# Altium PCB Microprocessor.PcbDoc
Units mil, origin at the board's own origin, x right, y up, seen from the top; angles counter-clockwise.
Board outline 4750 x 3250 mil, 4 copper layers (Top Layer, Layer 1, Layer 2, Bottom Layer), stack 23.756 mil thick; 7 components, 7 nets, 60 pads, 0 vias.
Unrouted connection lines stored in the file: 9.
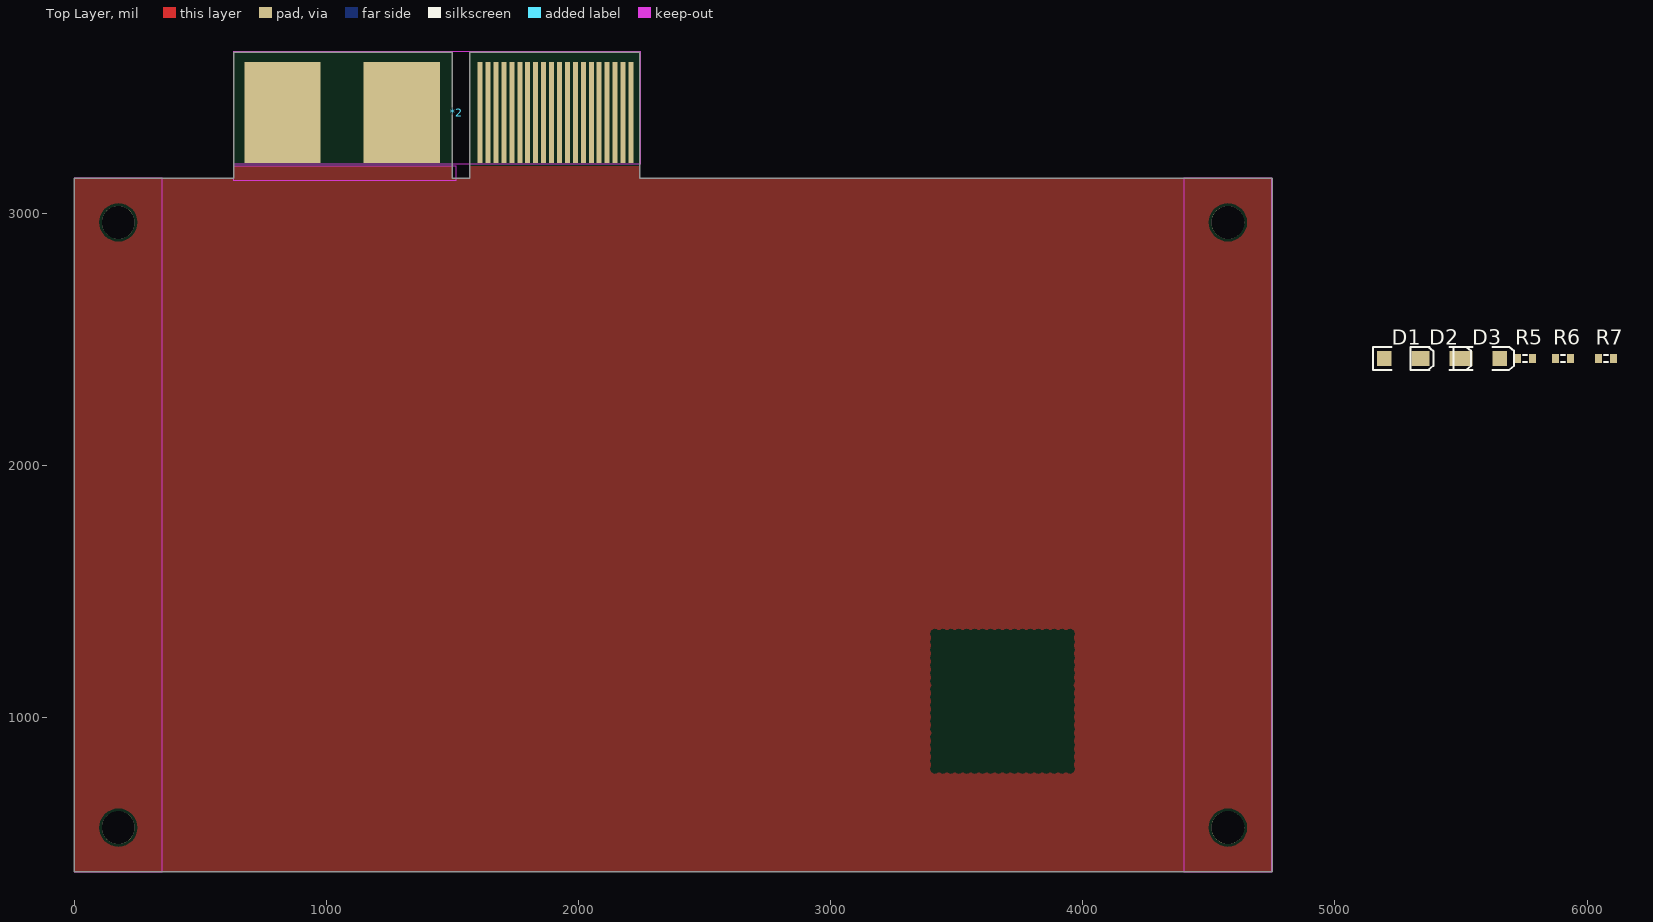
[diagram p0: Top Layer view]
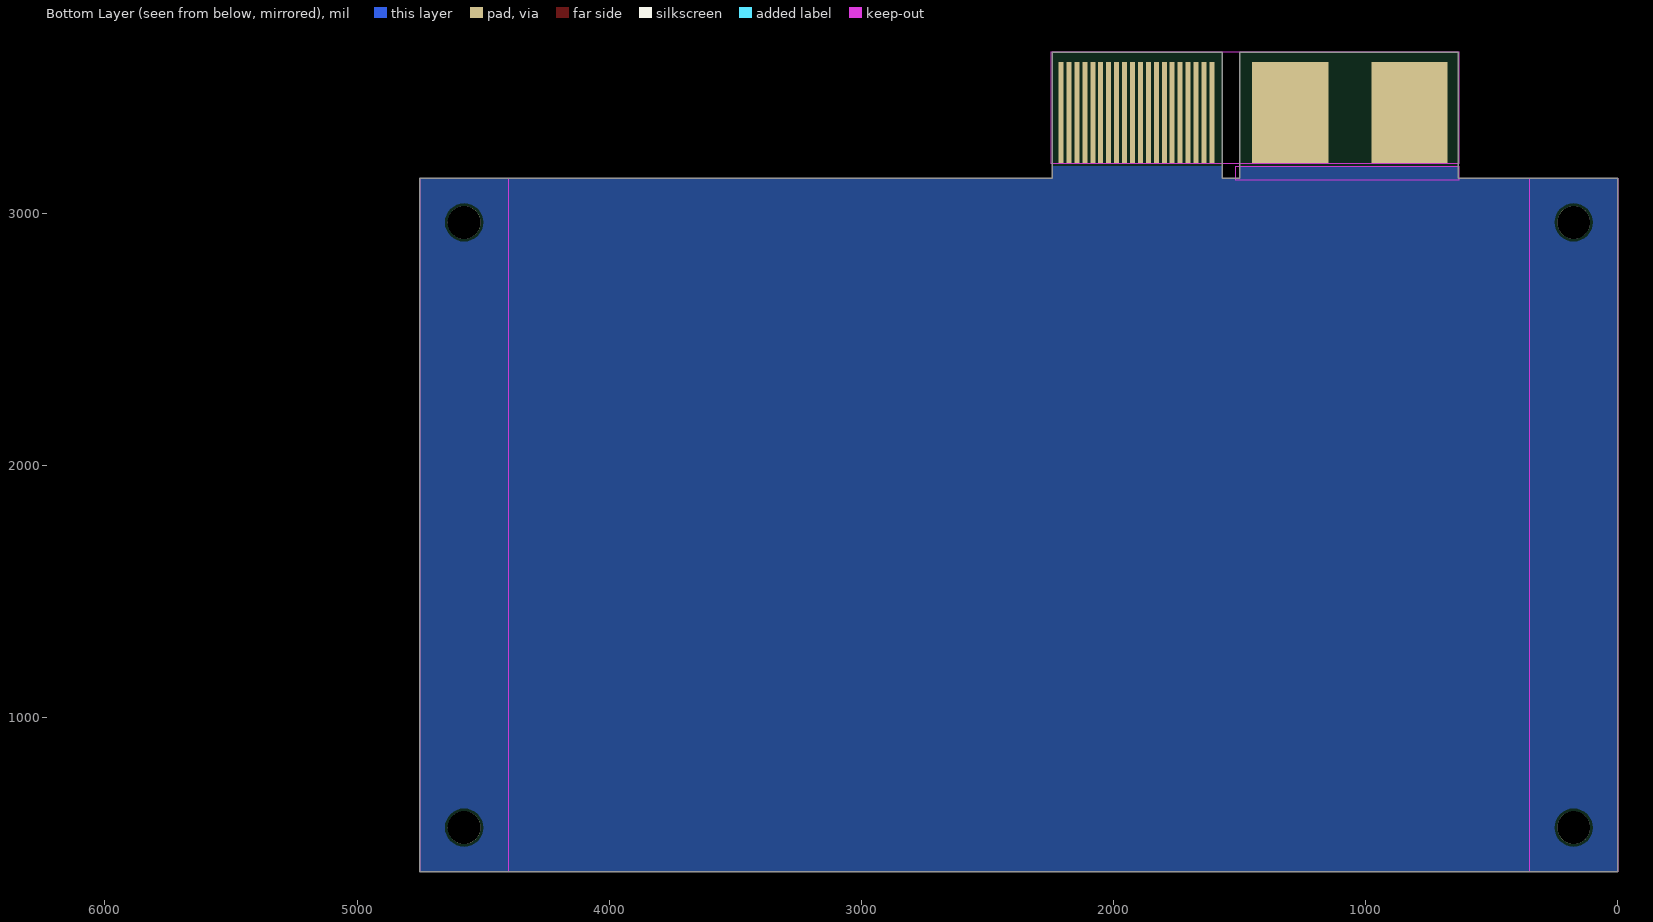
[diagram p1: Bottom Layer view, seen from below]
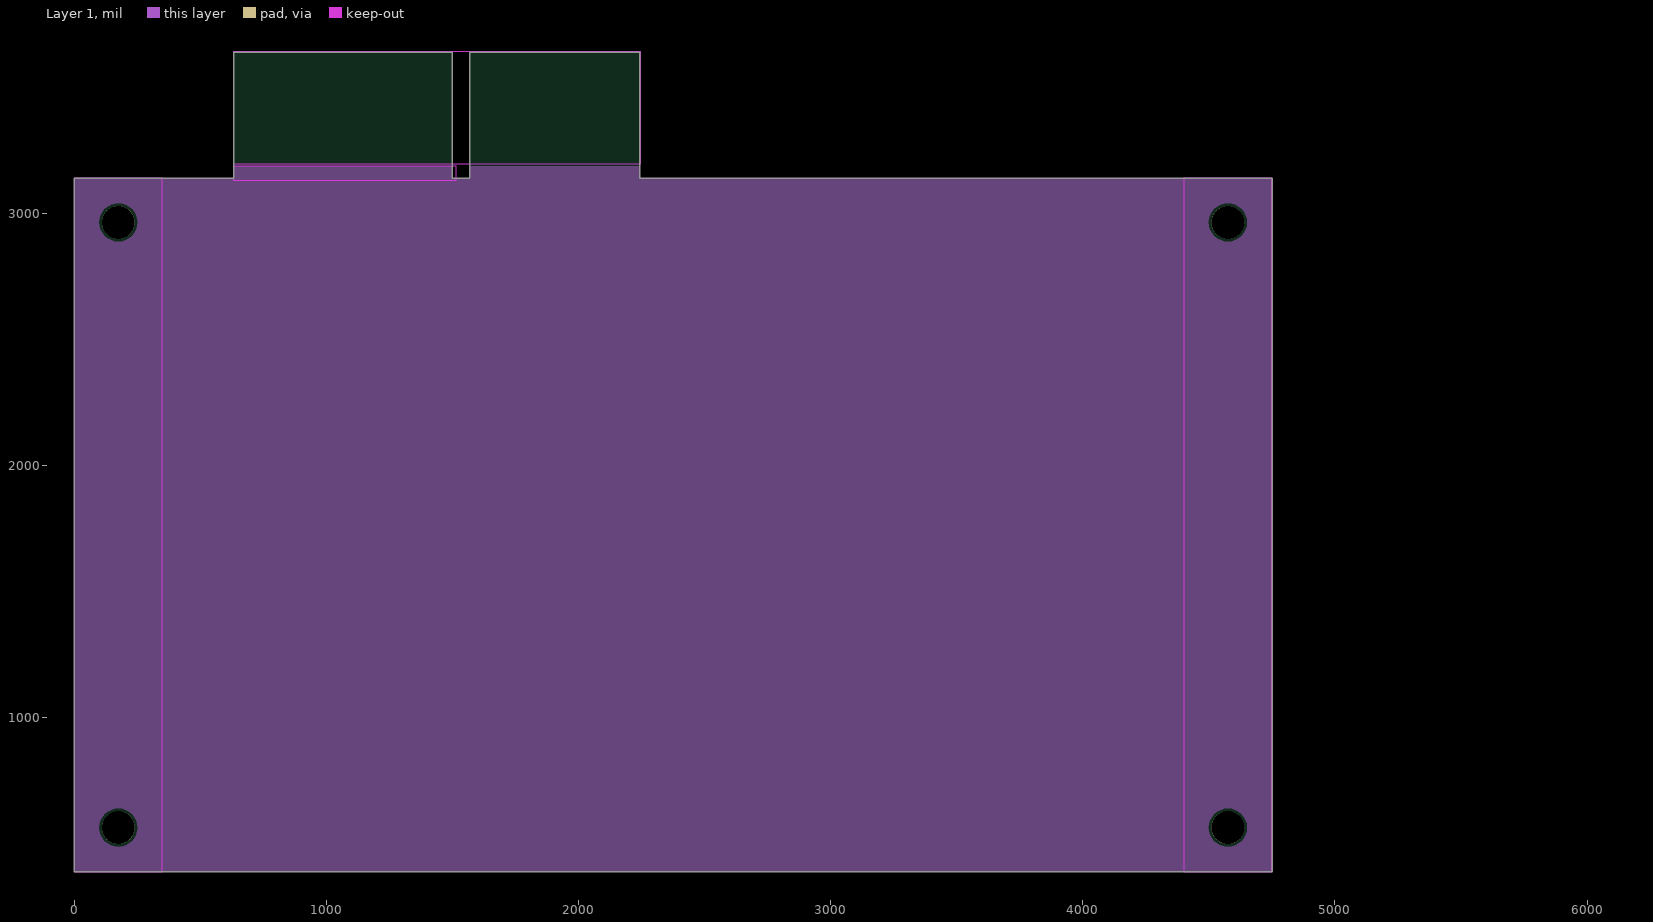
[diagram p2: Layer 1]
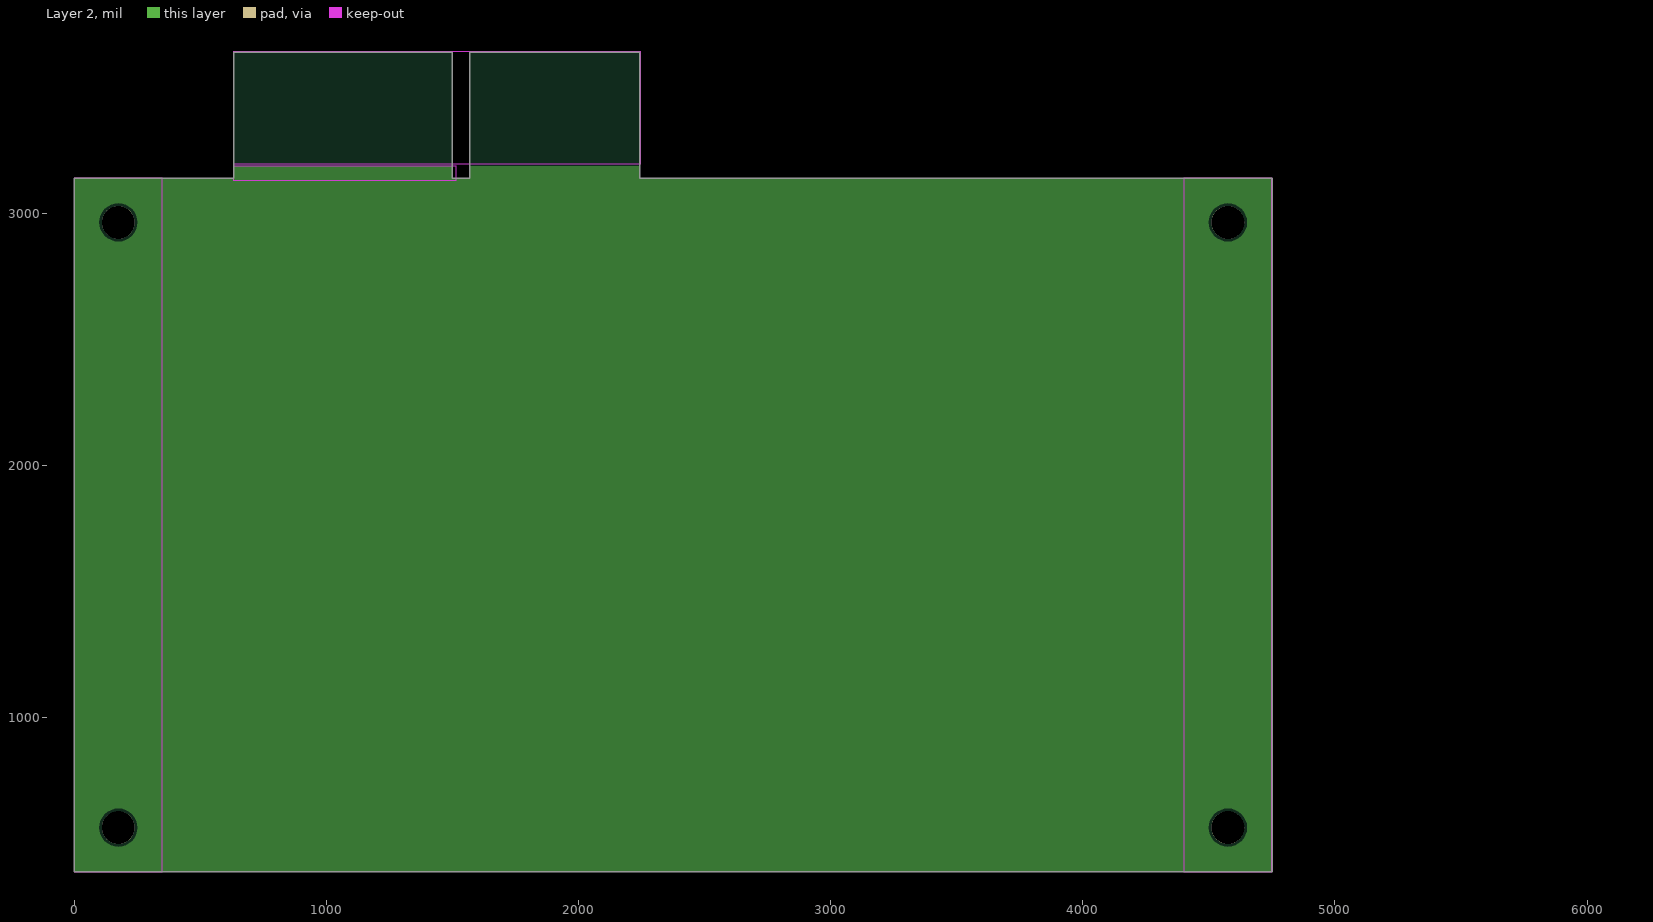
[diagram p3: Layer 2]

## Layer stack, top to bottom
Top Solder: solder mask 0.4, Solder Resist, Dk 3.5
Top Layer: signal copper 1.4
Dielectric 2: prepreg 2.8, PP-006, Dk 4.1
Layer 1: signal copper 1.378
Dielectric 1: dielectric 12.6, FR-4, Dk 4.8
Layer 2: signal copper 1.378
Dielectric 3: prepreg 2.8, PP-006, Dk 4.1
Bottom Layer: signal copper 1.4
Bottom Solder: solder mask 0.4, Solder Resist, Dk 3.5

## Board outline
0.5,389.5 0.5,3139.5 633.87,3139.5 633.87,3639.5 1498.87,3639.5 1498.87,3139.5 1568.87,3139.5 1568.87,3639.5 2243.86,3639.5 2243.86,3139.5 4750.5,3139.5 4750.5,389.5
cut-out: 2230,76045

## Design rules (kind name [scope] priority, off if disabled: settings)
Clearance [All] p1: gap=10 ignorepadtopadclearanceinfootprint=FALSE except(0: Arc-Hole Track-Hole SMDPad-Hole THPad-Hole Via-Hole Fill-Hole Poly-Hole Region-Hole Text-Hole)
PolygonConnect [All] p1: connectstyle=Relief reliefconductorwidth=10 reliefentries=4 polygonreliefangle="90 Angle" airgapwidth=10
RoomDefinition Motherboard [InComponentClass('Motherboard')] p1: confinementstyle=ConfineIn formatcopy=TRUE lockcomponents=FALSE outline 630.5,3195 2250.5,3195 2250.5,3640 630.5,3640
RoutingVias [All] p1: holewidth=28 width=50 viastyle="Through Hole" minholewidth=28 minwidth=50 maxholewidth=28 maxwidth=50
SolderMaskExpansion [All] p1: expansion=4 istentingtop=FALSE
Width [All] p1: maxlimit=10 minlimit=5 preferedwidth=10 toplayer_prefwidth=5 midlayer1_minwidth=10 midlayer2_minwidth=10 bottomlayer_prefwidth=5 minimp=50.000000 maximp=50.000000 favimp=50.000000
30 further rules are at their usual default settings.

## Components (designator, comment, footprint, x,y, rotation, side; value= is the part's Value field where it differs from the comment)
*2 "HSEC8-120-01-L-PV-4-1" "HSEC8-120-01-L-PV-4-1 Gold Fingers" 1455.5,3417.25 r0 top
D1 "LED2" 3.2X1.6X1.1 5264.5,2425 r0 top
D2 "LED2" 3.2X1.6X1.1 5414.5,2425 r0 top
D3 "LED2" 3.2X1.6X1.1 5584.5,2425 r0 top
R5 "Res3" J1-0603 5754.5,2425 r0 top value=1K
R6 "Res3" J1-0603 5904.5,2425 r0 top value=1K
R7 "Res3" J1-0603 6074.5,2425 r0 top value=1K

## Footprints (in the part's own frame and the unit in brackets; to place one, negate y for a bottom-side part, rotate by r counter-clockwise, add the part's x,y. Pads: shape width x height; smd on the part's side, far side on the other; paste and mask are expansions set on the pad)
3.2X1.6X1.1 [mm] "SMT LED; 2 Flat Leads"
  rect 1.5x1.5 smd: 1(-1.75,0) 2(1.75,0)
  silkscreen extent -2.9,-1.15 3.2,1.15
"HSEC8-120-01-L-PV-4-1 Gold Fingers" [mil]
  rect 303x400 smd: 0(-629,-17.25) 1(-156,-17.25)
  rect 19.68x400 smd: 2(154.5,-17.25) 3(186,-17.25) 4(217.5,-17.25) 5(249,-17.25) 6(280.5,-17.25) 7(312,-17.25) 8(343.5,-17.25) 9(375,-17.25) 10(406.5,-17.25) 11(438,-17.25) 12(469.5,-17.25) 13(501,-17.25) 14(532.5,-17.25) 15(564,-17.25) 16(595.5,-17.25) 17(627,-17.25) 18(658.5,-17.25) 19(690,-17.25) 20(721.5,-17.25) 21(753,-17.25)
  rect 303x400 smd far side: 22(-629,-17.25) 23(-156,-17.25)
  rect 19.68x400 smd far side: 24(154.5,-17.25) 25(186,-17.25) 26(217.5,-17.25) 27(249,-17.25) 28(280.5,-17.25) 29(312,-17.25) 30(343.5,-17.25) 31(375,-17.25) 32(406.5,-17.25) 33(438,-17.25) 34(469.5,-17.25) 35(501,-17.25) 36(532.5,-17.25) 37(564,-17.25) 38(595.5,-17.25) 39(627,-17.25) 40(658.5,-17.25) 41(690,-17.25) 42(721.5,-17.25) 43(753,-17.25)
  Keep-Out Layer region: -825,-220 792.61,-220 792.61,225 -825,225
  Keep-Out Layer region: -825,-285 60,-285 60,-230 -825,-230
  Keep-Out Layer region: -820,220
J1-0603 [mm] "Chip Resistor, Body 1.6x0.8mm, IPC High Density"
  rect 0.7x0.9 smd: 1(-0.75,0) 2(0.75,0)
  silkscreen extent -0.2,-0.35 0.2,0.35, body extent -0.85,-0.48 0.85,0.48, height 0.9

## Part data
D1 D2 D3: "Typical RED, GREEN, YELLOW, AMBER GaAs LED", LatestRevisionDate=17-Jul-2002, LatestRevisionNote="Re-released for DXP Platform.", PackageDescription="SM LED; 2 Flat Leads", PackageReference=3.2X1.6X1.1, PackageVersion=Feb-2002, Published=8-Jun-2000, Publisher="Altium Limited"
R5 R6 R7: "Resistor", LatestRevisionDate=29-May-2009, LatestRevisionNote="IPC-7351 Footprint Added.", PackageDescription="Chip Resistor", PackageReference=J1-0603, Published=8-Jun-2000, Publisher="Altium Limited"
*2: Supplier 1=Mouser

## Free pads (board coordinates)
  round 130 hole 130 unplated: 5(175.5,2964.5) 6(175.5,564.5) 7(4575.5,564.5) 8(4575.5,2964.5)

## Nets (pads, with @x,y where several pads share a name; then routed paths per layer and width w, separated by ;. In a path a pad name is that pad's centre, name@x,y a point inside that pad or via, vN(x,y) a via of type N, cw(c..) or ccw(c..) an arc to the next point about the centre after c; other vN are vias at no path point)
1V8: *2.0 R7.2
3V3: *2.23 R6.1
5V0: *2.1 R5.1
GND: *2.22 D1.2 D2.2 D3.2
NetD1_1: D1.1 R5.2
NetD2_1: D2.1 R6.2
NetD3_1: D3.1 R7.1
pads on no net: *2.2 *2.3 *2.4 *2.5 *2.6 *2.7 *2.8 *2.9 *2.10 *2.11 *2.12 *2.13 *2.14 *2.15 *2.16 *2.17 *2.18 *2.19 *2.20 *2.21 *2.24 *2.25 *2.26 *2.27 *2.28 *2.29 *2.30 *2.31 *2.32 *2.33 *2.34 *2.35 *2.36 *2.37 *2.38 *2.39 *2.40 *2.41 *2.42 *2.43

## Polygon pours and split planes (outlines as drawn)
no net on Bottom Layer "NONET_L04_P003" (solid, pour order 3): 0.5,389.5 0.5,3139.5 633.87,3139.5 633.87,3639.5 1498.87,3639.5 1498.87,3139.5 1568.87,3139.5 1568.87,3639.5 2243.86,3639.5 2243.86,3139.5 4750.5,3139.5 4750.5,389.5
no net on Layer 1 "NONET_L02_P004" (solid, pour order 4): 0.5,389.5 0.5,3139.5 633.87,3139.5 633.87,3639.5 1498.87,3639.5 1498.87,3139.5 1568.87,3139.5 1568.87,3639.5 2243.86,3639.5 2243.86,3139.5 4750.5,3139.5 4750.5,389.5
no net on Layer 2 "NONET_L03_P005" (solid, pour order 5): 0.5,389.5 0.5,3139.5 633.87,3139.5 633.87,3639.5 1498.87,3639.5 1498.87,3139.5 1568.87,3139.5 1568.87,3639.5 2243.86,3639.5 2243.86,3139.5 4750.5,3139.5 4750.5,389.5
no net on Top Layer "NONET_L01_P002" (solid, pour order 2): 0.5,389.5 0.5,3139.5 633.87,3139.5 633.87,3639.5 1498.87,3639.5 1498.87,3139.5 1568.87,3139.5 1568.87,3639.5 2243.86,3639.5 2243.86,3139.5 4750.5,3139.5 4750.5,389.5

## Keep-outs
Keep-Out Layer:
  rectangle: 4400,390 4750,3140
  rectangle: 0,390 350,3140

## Silkscreen, mask and mechanical layers (free items; w line width, h text height)
Mechanical 1:
  circle w0.5: c4575.5,564.5 r64.25
  circle w0.5: c4575.5,2964.5 r64.25
  circle w0.5: c175.5,2964.5 r64.25
  circle w0.5: c175.5,564.5 r64.25
  lines w0.5: 629.37,3639.5 1494.37,3639.5 ; 633.87,3639.5 633.87,3139.5 0.5,3139.5 0.5,389.5 4750.5,389.5 4750.5,3139.5 2243.86,3139.5 2243.86,3639.5 ; 1498.87,3639.5 1498.87,3139.5 1568.87,3139.5 1568.87,3639.5 ; 1564.37,3639.5 2239.36,3639.5